# Altium PCB station2020.PcbDoc
Units mm, origin at the board's own origin, x right, y up, seen from the top; angles counter-clockwise.
Board outline 94.74 x 99.44 mm, 2 copper layers (Top Layer, Bottom Layer); 18 components, 21 nets, 94 pads, 42 vias.
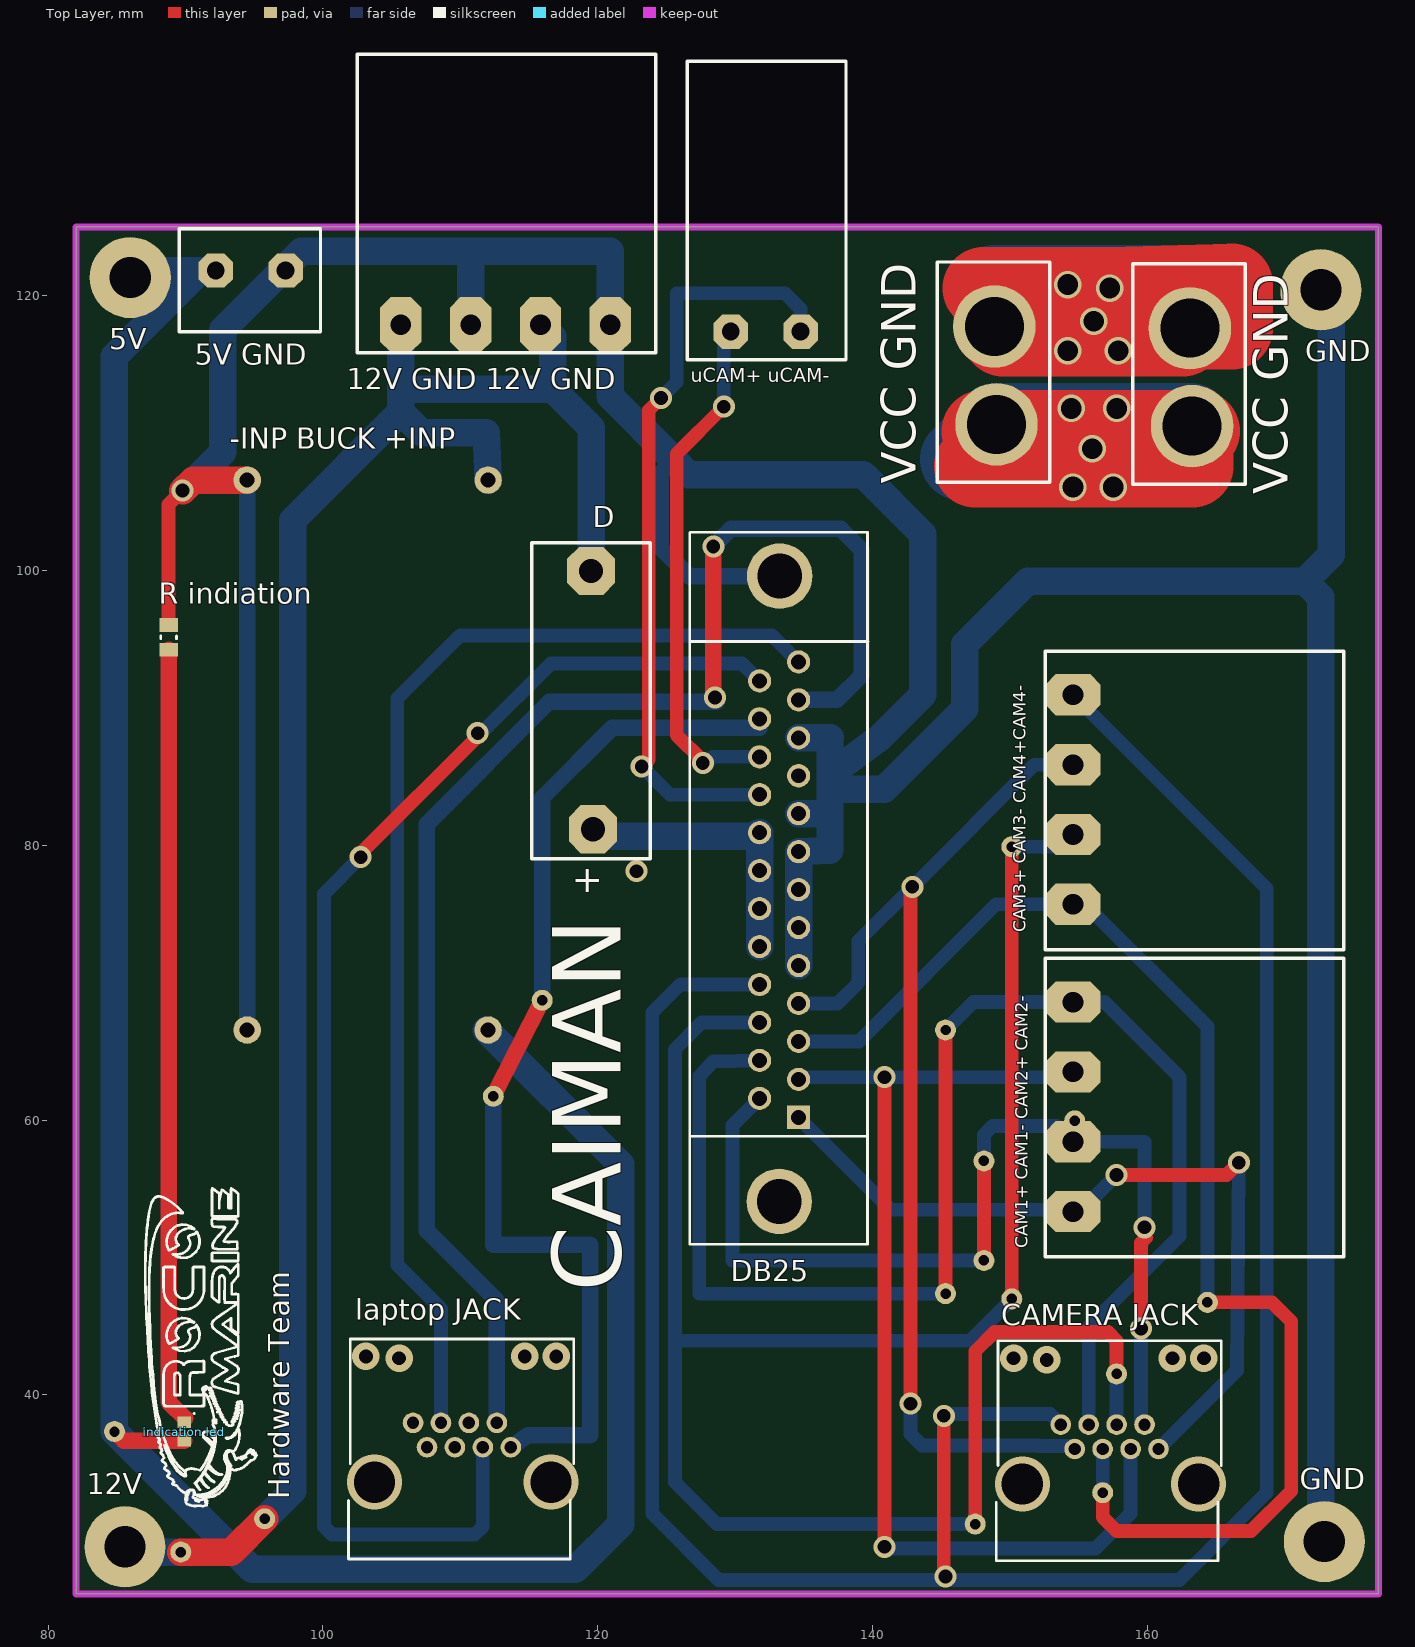
[diagram p0: Top Layer view]
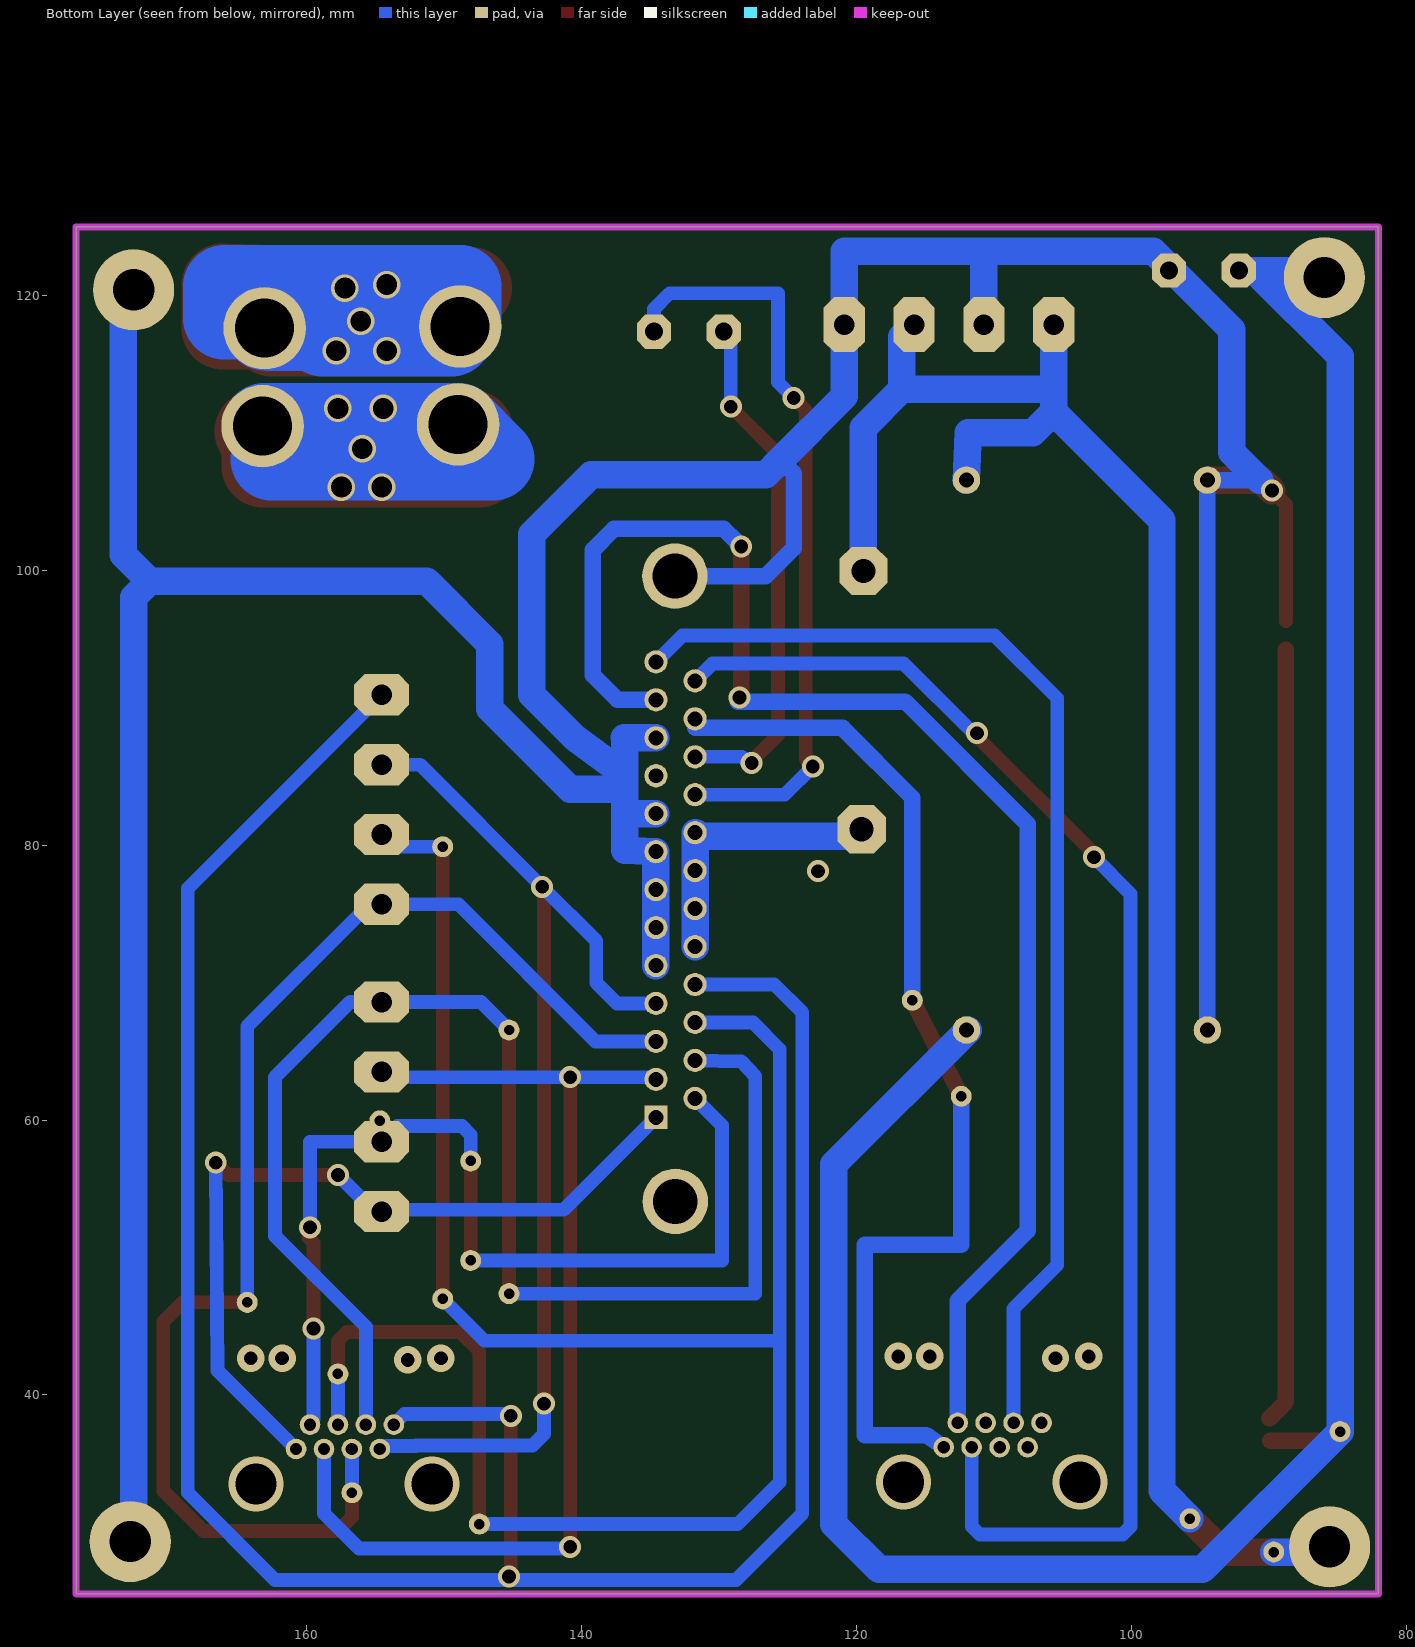
[diagram p1: Bottom Layer view, seen from below]

## Layer stack, top to bottom
Top Solder: solder mask 0.0102, Solder Resist, Dk 3.5
Top Layer: signal copper 0.0356
Dielectric 1: dielectric 0.32, FR-4, Dk 4.8
Bottom Layer: signal copper 0.0356
Bottom Solder: solder mask 0.0102, Solder Resist, Dk 3.5

## Board outline
82.042,25.527 82.042,124.968 176.784,124.968 176.784,25.527

## Design rules (kind name [scope] priority, off if disabled: settings)
Clearance [All] p1: gap=0.3 ignorepadtopadclearanceinfootprint=FALSE
PolygonConnect [All] p1: connectstyle=Relief reliefconductorwidth=0.254 reliefentries=4 polygonreliefangle="90 Angle" airgapwidth=0.254
RoutingVias [All] p1: holewidth=0.711 width=1.27 viastyle="Through Hole" minholewidth=0.711 minwidth=1.27 maxholewidth=0.711 maxwidth=1.27
SolderMaskExpansion [All] p1: expansion=0.102
Width [All] p1: maxlimit=10 minlimit=0.8 preferedwidth=1
30 further rules are at their usual default settings.

## Classes and differential pairs
component class "station 2020": 317T2 cam1 "CAM1+ CAM1- CAM2+ CAM2-" "CAM3+ CAM3- CAM4+CAM4-" "CAMERA JACK" D1 "indication led" "laptop JACK" "R indiation" "res 1" "res 1206"

## Components (designator, comment, footprint, x,y, rotation, side; value= is the part's Value field where it differs from the comment)
5V "Component_1" PCBComponent_1#1 92.71,113.03 r90 top (schematic designator 2)
"5V GND" "Rossetta" "Rossetta 2-pin" 92.202,121.793 r180 top (schematic designator 5V)
12V "Component_1" PCBComponent_1#1 92.329,20.701 r90 top (schematic designator 1)
"12V GND 12V GND" "Rossetta 4-pin" "Rossetta 4-pin plugable" 113.284,117.856 r0 top (schematic designator "spare 12v")
"-INP BUCK +INP" "buck converter" PCBComponent_1#2 104.521,89.154 r270 top (schematic designator "buck converter")
"CAM1+ CAM1- CAM2+ CAM2-" "Rossetta 4-pin" "Rossetta 4-pin plugable" 154.559,60.96 r270 top (schematic designator cam1,2)
"CAM3+ CAM3- CAM4+CAM4-" "Rossetta 4-pin" "Rossetta 4-pin plugable" 154.559,83.312 r270 top (schematic designator camera3,4)
"CAMERA JACK" "ethernet jack" "Ethernet Jack With lED" 157.226,36.957 r0 top (schematic designator "cameras JACK1")
D "Diode" "Diode High Current" 119.888,82.423 r90 top (schematic designator diode1)
DB25 "DB 25" DB25 133.179,76.823 r90 top (schematic designator dp1)
GND "Component_1" PCBComponent_1#1 179.578,21.082 r90 top (schematic designator 3)
GND "Component_1" PCBComponent_1#1 179.324,112.141 r90 top (schematic designator 4)
"indication led" "0603 smd led" "0603  led" 89.916,37.338 r90 top
"laptop JACK" "ethernet jack" "Ethernet Jack With lED" 110.109,37.084 r0 top
"R indiation" "0805" 0805 73.923,75.312 r270 top
"uCAM+ uCAM-" "cam5" "Rossetta 2-pin Pugable" 132.207,117.348 r0 top (schematic designator ucamera)
"VCC GND" "xt60" xt60 163.068,110.402 r90 top (schematic designator XT2)
"VCC GND" "xt60" xt60 148.844,110.529 r90 top (schematic designator XT1)

## Footprints (in the part's own frame and the unit in brackets; to place one, negate y for a bottom-side part, rotate by r counter-clockwise, add the part's x,y. Pads: shape width x height; smd on the part's side, far side on the other; paste and mask are expansions set on the pad)
"0603  led" [mm]
  rect 0.85x1 smd: 1(-0.675,0) 2(0.675,0)
  silkscreen extent 1.26,-0.76 1.36,-0.66, body extent -0.9,-0.5 0.9,0.5, height 0.6
0805 [mm] "Chip Resistor, 2-Leads, Body 2.00x1.25mm, IPC Medium Density"
  rect 1x1.35 smd: 1(-20.7,14.85) 2(-18.9,14.85)
  silkscreen extent -19.9,14.27 -19.7,15.42, body extent -20.85,14.17 -18.75,15.52, height 0.6
DB25 [mm]
  rect 1.69x1.69 hole 1.09: 1(-16.628,-1.42)
  round 1.69 hole 1.09: 2(-15.247,1.42) 3(-13.867,-1.42) 4(-12.486,1.42) 5(-11.106,-1.42) 6(-9.725,1.42) 7(-8.345,-1.42) 8(-6.964,1.42) 9(-5.584,-1.42) 10(-4.203,1.42) 11(-2.823,-1.42) 12(-1.442,1.42) 13(-0.062,-1.42) 14(1.319,1.42) 15(2.699,-1.42) 16(4.08,1.42) 17(5.46,-1.42) 18(6.841,1.42) 19(8.221,-1.42) 20(9.602,1.42) 21(10.982,-1.42) 22(12.363,1.42) 23(13.743,-1.42) 24(15.124,1.42) 25(16.504,-1.42)
  round 4.76 hole 3.26: 26(-22.745,-0.014) 27(22.745,-0.044)
  silkscreen extent -25.86,-6.46 25.93,6.5, body extent -25.91,-6.5 25.94,6.5, height 12.3
"Diode High Current" [mm]
  oct 3.5x3.5 hole 1.75: 1(-1.27,0.254) 2(17.526,0.381)
  silkscreen extent -3.43,-3.94 19.56,4.7, body extent -1.96,-4.06 18.22,4.74, height 9.1
"Ethernet Jack With lED" [mm]
  round 1.5 hole 0.9: 1(3.556,-0.889) 2(2.54,0.889) 3(1.524,-0.889) 4(0.508,0.889) 5(-0.508,-0.889) 6(-1.524,0.889) 7(-2.54,-0.889) 8(-3.556,0.889)
  silkscreen extent -8.25,-9.02 8.13,6.98, body extent -7.87,-8.91 7.87,6.48, height 3.19
PCBComponent_1#1 [mm]
  round 5.9 hole 3: 1(8.255,6.731)
PCBComponent_1#2 [mm]
  round 2 hole 1.1: +IN(-17.399,7.493) +OUT(22.606,7.493) -IN(-17.399,-10.033) -OUT(22.606,-10.033)
  body extent -18.87,-11.88 24.13,9.27, height 1
"Rossetta 2-pin" [mm]
  oct 2.5x2.5 hole 1.3: 1(0,0) 2(-5.08,0)
  silkscreen extent -7.62,-3.05 2.67,4.44, body extent -7.62,-3.17 2.54,4.33, height 10
"Rossetta 2-pin Pugable" [mm]
  oct 2.5x2.5 hole 1.3: 1(2.54,0) 2(-2.54,0)
  silkscreen extent -5.71,-2.03 5.84,19.68, body extent -5.77,-1.85 5.83,19.65, height 16
"Rossetta 4-pin plugable" [mm]
  oct 3x4 hole 1.5: 1(-7.62,0) 2(-2.54,0) 3(2.54,0) 4(7.62,0)
  silkscreen extent -10.79,-2.03 10.92,19.68, body extent -10.85,-1.85 10.79,19.65, height 16
xt60 [mm]
  round 6 hole 4.3: GND(7.2,0) VCC(0.076,-0.152)
  silkscreen extent -4.14,-4.01 11.89,4.17, body extent -4.06,-4.01 11.84,4.14, height 16.2

## Part data
"CAMERA JACK": "ethernet jack to 4ch balun (male HUB BNC Female terminal)", Nour=Aldin
"R indiation": library part "0805 IMP resistor", "0805 IMP resistor", Created By="shahenda dora", data sheet link=https://datasheet.lcsc.com/szlcsc/YAGEO-RC0805JR-0747ML_C137426.pdf, supply chain link=https://lcsc.com/products/Chip-Resistor-Surface-Mount_439.html
"uCAM+ uCAM-": library part Rossetta, "Rossetta"
"VCC GND" "VCC GND": "Lithium-Ion Model Connectors XT60-M Rohs", Created By="Hadeer Abouzeid", Data=21/10/2019, datasheet=https://datasheet.lcsc.com/szlcsc/1810251322_Changzhou-Amass-Elec-XT60_C98733.pdf, Supply chain LCSC=https://lcsc.com/product-detail/Connectors_Changzhou-Amass-Elec-XT60Male-head_C98733.html
"12V GND 12V GND" "CAM1+ CAM1- CAM2+ CAM2-" "CAM3+ CAM3- CAM4+CAM4-": Created By=NourAldin
D: Created By="Nour Aldin"
"indication led": Created By="shahenda dora", data sheet link=https://datasheet.lcsc.com/szlcsc/Orient-ORH-B36G_C193191.pdf, supply chain=https://lcsc.com/search?q=0603%20led
"laptop JACK": Nour=Aldin

## Free pads (board coordinates)
  round 1.524 hole 0.762: 2(115.951,68.707) 3(112.395,61.722) 5(148.082,57.023) 8(148.082,49.784) 10(145.288,66.548) 11(145.288,47.371) 12(150.114,79.883) 13(150.114,46.99) 15(84.836,37.338) 16(95.758,30.988) 17(89.662,28.575) 18(89.662,28.575) 19(156.718,32.893) 20(157.734,41.529) 21(147.447,30.607) 22(154.686,59.944) 23(164.338,46.736)

## Via types
v1: diameter 1.6, hole 1, Top Layer to Bottom Layer, 20 vias
v2: diameter 2, hole 1.5, Top Layer to Bottom Layer, 10 vias
v3: diameter 2, hole 1, Top Layer to Bottom Layer, 8 vias
v4: diameter 4, hole 3, Top Layer to Bottom Layer, 4 vias

## Nets (pads, with @x,y where several pads share a name; then routed paths per layer and width w, separated by ;. In a path a pad name is that pad's centre, name@x,y a point inside that pad or via, vN(x,y) a via of type N, cw(c..) or ccw(c..) an arc to the next point about the centre after c; other vN are vias at no path point)
5vo: 5V.1 "5V GND.1" "-INP BUCK +INP.+OUT" "indication led.1" pad.15 | length 179.7
  Top Layer w1.2: pad.15 85.511,36.663 89.916,36.663
  Bottom Layer w1.2: 91.948,121.793 92.202,121.793
  Bottom Layer w2: 5V.1@87.249,121.793 91.948,121.793 ; 91.059,121.793 84.836,115.57 pad.15 94.869,27.305 118.364,27.305 121.666,30.607 121.666,56.769 111.887,66.548
12v: D.1 DB25.10 DB25.12 DB25.14 DB25.16 DB25.19 | length 20.9
  Bottom Layer w1.2: DB25.16@131.446,81.216 DB25.16 DB25.16@131.501,80.645
  Bottom Layer w2: D.1@119.888,81.153 120.396,80.645 DB25.16@131.501,80.645 ; DB25.10 DB25.12 DB25.14 DB25.16
  other v1: 122.809,78.105
12Vo: 12V.1 "12V GND 12V GND.1" "12V GND 12V GND.3" "-INP BUCK +INP.+IN" D.2 pad.16 pad.17 pad.18 | length 143.6
  Top Layer w2: pad.17 93.345,28.575 pad.16
  Bottom Layer w1: 115.824,117.856 116.713,116.967
  Bottom Layer w2: 12V.1@85.471,28.575 pad.17 ; pad.16 97.79,33.02 97.79,103.632 105.664,111.506 ; 105.664,117.856 105.664,113.157 ; 112.014,106.553 111.887,109.982 107.188,109.982 105.664,111.506 ; 116.713,116.967 116.713,113.157 ; D.2@119.126,100.584 D.2@119.507,100.965 ; D.2 D.2@119.507,100.965 ; 105.664,111.506 105.664,113.157 ; 105.664,113.157 116.713,113.157 ; 116.713,113.157 119.507,110.363 D.2@119.507,100.965
CAM+1: "CAM1+ CAM1- CAM2+ CAM2-.4" "CAMERA JACK.1" DB25.1 | length 60.3
  Top Layer w1: v1(157.734,56.007) 165.735,56.007 v1(166.624,56.896)
  Bottom Layer w1: DB25.1 141.327,53.467 154.432,53.467 155.067,54.102 ; 154.559,53.34 155.067,53.34 v1(157.734,56.007) ; 160.782,36.068 166.497,41.783 v1(166.624,56.896)
CAM+2: "CAM1+ CAM1- CAM2+ CAM2-.2" "CAMERA JACK.3" DB25.3 | length 78.5
  Top Layer w1: v1@140.716,63.119 v1(140.843,63.119) v1(140.843,28.956)
  Bottom Layer w1: DB25.3@134.345,63.21 DB25.3@134.609,63.199 ; DB25.3 134.762,63.119 154.559,63.119 ; v1@140.716,29.083 140.97,28.829 156.21,28.829 158.75,31.369 158.75,36.068
CAM+3: "CAM3+ CAM3- CAM4+CAM4-.4" "CAMERA JACK.5" DB25.5 pad.19 pad.23 | length 96.9
  Top Layer w1: pad.19 156.718,31.115 157.734,30.099 167.513,30.099 170.434,33.02 170.434,45.339 169.037,46.736 pad.23
  Bottom Layer w1: DB25.5 138.996,65.717 148.971,75.692 155.448,75.692 164.338,66.802 pad.23 ; pad.19 156.718,36.068
CAM+4: "CAM3+ CAM3- CAM4+CAM4-.2" "CAMERA JACK.7" DB25.7 | length 82.1
  Top Layer w1: v1(142.746,39.368) 142.746,76.833 v1(142.875,76.962)
  Bottom Layer w1: DB25.7 137.439,68.478 138.938,69.977 138.938,73.025 v1(142.875,76.962) 151.765,85.852 154.559,85.852 153.924,85.217 ; v1(142.746,39.368) 142.746,37.162 143.58,36.328 152.036,36.328 152.068,36.296 154.458,36.296 154.686,36.068
CAM-1: "CAM1+ CAM1- CAM2+ CAM2-.3" "CAMERA JACK.2" DB25.2 pad.5 pad.8 pad.22 | length 72.7
  Top Layer w1: pad.8 pad.5 ; v1(159.512,44.831) 159.512,51.054 v1@159.893,51.435
  Bottom Layer w1: DB25.2@131.765,61.581 DB25.2 129.794,59.611 129.794,49.784 pad.8 ; pad.5 148.082,58.928 148.717,59.563 153.416,59.563 154.559,58.42 159.766,58.42 159.766,52.451 v1@159.512,52.197 ; v1(159.512,44.831) 159.512,38.454 159.516,38.45 159.516,38.231 159.893,37.854 159.893,37.846
  other v1: 159.766,52.197
CAM-2: "CAM1+ CAM1- CAM2+ CAM2-.1" "CAMERA JACK.6" DB25.4 pad.10 pad.11 | length 105.9
  Top Layer w1: pad.11 pad.10
  Bottom Layer w1: DB25.4 128.397,64.262 127.381,63.178 127.381,47.371 pad.11 ; pad.10 147.32,68.58 154.559,68.58 156.845,68.58 162.306,63.119 162.306,51.562 155.702,44.958 155.702,37.846
CAM-3: "CAM3+ CAM3- CAM4+CAM4-.3" "CAMERA JACK.4" DB25.6 pad.12 pad.13 pad.20 pad.21 | length 154.9
  Top Layer w1: pad.21 147.447,43.18 148.844,44.577 157.099,44.577 157.734,43.942 pad.20 ; pad.13 pad.12
  Bottom Layer w1: 125.603,43.942 147.066,43.942 pad.13 ; DB25.6@131.765,67.103 DB25.6 127.55,67.098 125.603,65.151 125.603,33.655 128.651,30.607 pad.21 ; pad.12 153.67,79.883 154.559,80.772 ; 157.734,37.846 pad.20
CAM-4: "CAM3+ CAM3- CAM4+CAM4-.1" "CAMERA JACK.8" DB25.8 | length 178.9
  Top Layer w1: v1(145.161,38.481) 145.161,26.924 v1(145.288,26.797)
  Bottom Layer w1: DB25.8 125.993,69.859 123.952,67.818 123.952,31.369 128.778,26.543 145.288,26.543 162.306,26.543 168.656,32.893 168.656,76.835 154.559,90.932 ; v1(145.161,38.481) 145.288,38.608 152.908,38.608 153.67,37.846
Di1: "laptop JACK.1" DB25.22 pad.2 pad.3 | length 78.9
  Top Layer w1.2: pad.3 pad.2
  Bottom Layer w1.2: pad.3 112.395,50.927 119.431,50.927 119.431,37.084 114.935,37.084 113.665,36.195 ; pad.2 115.951,83.439 121.031,88.519 131.759,88.519 DB25.22
Di2: "laptop JACK.2" DB25.23 | length 107.8
  Top Layer w1.2: v1(128.397,101.727) 128.397,90.917 128.58,90.734 v1(128.524,90.734)
  Bottom Layer w1.2: 112.649,37.973 112.649,46.863 107.569,51.943 107.569,81.534 116.459,90.424 128.636,90.424 128.524,90.536 v1(128.524,90.734) ; v1@128.783,102.113 129.667,102.997 137.668,102.997 139.192,101.473 139.192,92.353 137.405,90.566 DB25.23
Di3: "laptop JACK.3" DB25.24 | length 103.5
  Top Layer w1: v1(102.743,79.121) 102.743,79.375 111.252,87.884 v1(111.252,88.138)
  Bottom Layer w1: v1(102.743,79.121) 100.076,76.454 100.076,30.431 100.662,29.845 111.047,29.845 111.633,30.431 111.633,36.195 ; v1@111.252,87.884 v1(111.252,88.138) 111.506,88.138 116.586,93.218 130.488,93.218 DB25.24 DB25.24@131.76,91.948
Di4: "laptop JACK.6" DB25.25 | length 86.2
  Bottom Layer w1: 105.461,49.403 105.41,49.454 ; 108.585,37.973 108.585,46.279 105.41,49.454 ; DB25.25@134.747,93.475 DB25.25 132.676,95.25 109.982,95.25 105.41,90.678 105.41,49.454
GND: "5V GND.2" "12V GND 12V GND.2" "12V GND 12V GND.4" "-INP BUCK +INP.-IN" "-INP BUCK +INP.-OUT" "R indiation.1" DB25.9 DB25.11 DB25.13 DB25.15 DB25.17 DB25.21 DB25.27 GND.1 | length 343
  Top Layer w1: 88.772,96.289 88.772,104.774 v1(89.789,105.791)
  Top Layer w2: v1(89.789,105.791) 90.551,106.553 94.488,106.553
  Bottom Layer w1.2: v1(89.789,105.791) 90.551,106.553 90.678,106.553 94.488,106.553 94.488,66.548 ; 125.539,108.014 124.587,107.061 124.587,101.6 126.619,99.568 DB25.27 ; 136.872,82.283 136.885,82.296 ; 136.885,83.82 137.139,84.074 ; 136.885,87.794 136.9,87.805
  Bottom Layer w2: 90.678,106.553 92.71,108.585 92.71,117.475 98.425,123.19 110.744,123.19 ; 110.744,117.856 110.744,123.19 ; DB25.9 DB25.11 DB25.13 DB25.15 136.885,79.616 136.885,82.296 136.885,83.82 136.885,87.794 ; DB25.17 136.872,82.283 ; DB25.21 136.9,87.805 ; 137.044,85.255 140.51,87.805 143.637,90.932 143.637,102.616 139.319,106.934 126.619,106.934 125.539,108.014 120.904,112.649 120.904,117.856 120.904,123.19 110.744,123.19 ; 137.139,84.074 140.843,84.074 146.685,89.916 146.685,94.615 151.257,99.187 171.421,99.187 ; GND.1@172.847,29.337 172.609,29.575 172.609,31.935 172.593,31.951 172.593,98.015 171.421,99.187 ; GND.1@173.355,122.174 173.355,101.121 171.421,99.187
"Netindication led_2": "indication led.2" "R indiation.2" | length 56.4
  Top Layer w1.2: 88.773,94.212 88.773,39.497 89.98,38.291
NetXT1_GND: 
NetXT1_VCC: 
uCAM+: "uCAM+ uCAM-.2" DB25.20 | length 38
  Top Layer w1: v1@127.635,86.106 125.73,88.011 125.73,108.458 v1(129.159,111.887)
  Bottom Layer w1: v1@127.508,86.233 128.143,86.233 128.335,86.425 DB25.20 ; v1(129.159,111.887) 129.159,116.84 129.667,117.348
  other v1: 127.635,85.979
uCAM-: "uCAM+ uCAM-.1" DB25.18 | length 56.2
  Top Layer w1: v1(123.19,85.725) 123.698,86.233 123.698,111.633 v1(124.587,112.522)
  Bottom Layer w1: v1(123.19,85.725) 125.251,83.664 DB25.18 ; v1@124.46,112.395 125.73,113.665 125.73,120.142 133.604,120.142 134.747,118.999 134.747,117.348
pads on no net: "laptop JACK.4" "laptop JACK.5" "laptop JACK.7" "laptop JACK.8" "VCC GND.GND" "VCC GND.VCC" DB25.26
copper on no net: | length 147.7
  Top Layer w6: 147.447,107.569 163.22,107.569 163.22,110.097 ; 147.98,110.097 163.22,110.097 ; 148.082,120.523 v2(157.226,120.523) 166.116,120.777 166.116,117.602 163.068,117.602 162.56,117.094 157.353,117.094 149.479,117.094 148.844,117.729 ; 163.22,110.478 163.22,110.097 ; 163.703,110.097 163.22,110.097
  Bottom Layer w0.8: 163.093,110.605 163.22,110.478
  Bottom Layer w6: 162.56,108.077 146.431,108.077 148.959,110.605 163.093,110.605 ; 148.844,117.729 148.844,120.65 156.083,120.65 163.068,120.65 165.989,120.65 165.989,118.31 163.856,118.31 163.076,117.53 162.627,117.482 159.243,117.482 158.855,117.094 155.194,117.094 149.479,117.094 148.844,117.729
  other v2: 154.559,106.045 157.48,106.045 155.956,108.839 154.432,111.76 157.734,111.76 154.178,115.951 157.861,115.951 156.083,118.11 154.178,120.777
  other v3: 152.654,42.545 105.537,42.672 150.241,42.672 161.798,42.672 164.084,42.672 103.124,42.799 114.681,42.799 116.967,42.799
  other v4: 150.876,33.528 163.703,33.528 103.759,33.655 116.586,33.655

## Keep-outs
Keep-Out Layer:
  the board outline again, w0.5

## Silkscreen, mask and mechanical layers (free items; w line width, h text height)
Top Overlay:
  drawing of 1936 lines, arcs and shapes, not listed
  text "+" at 118.11,76.581 h2
  text "CAIMAN" at 121.666,47.498 h5 r90
  text "Hardware Team" at 97.561,32.41 h1.52 r90